# EAGLE board ExtraCore_2-panelized (EAGLE 6.2)
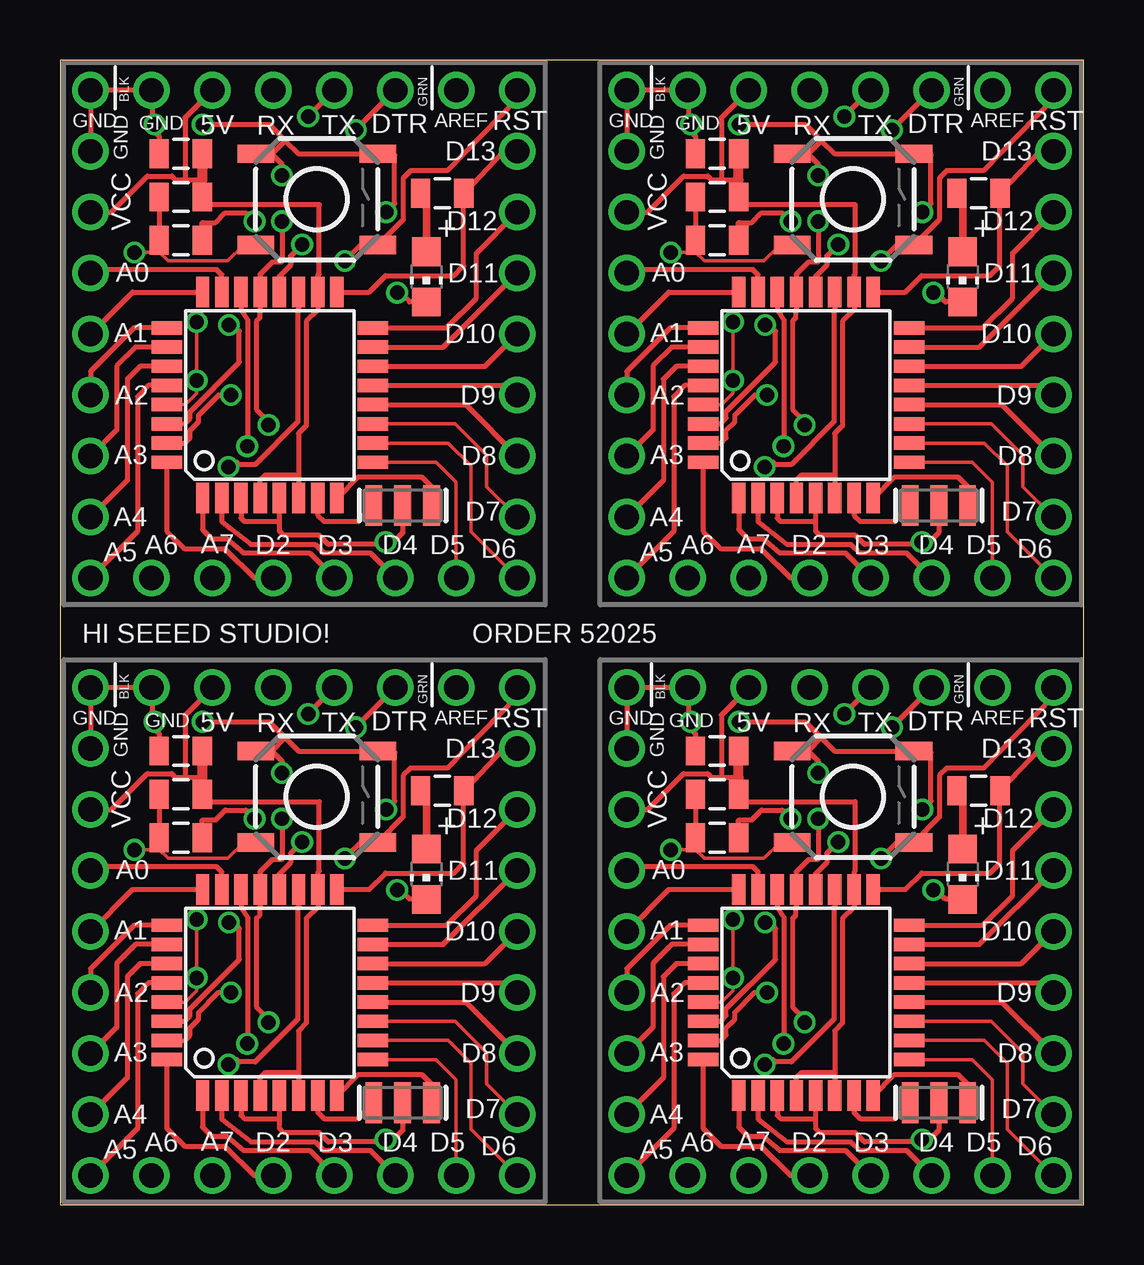
[diagram p0: board, top side]
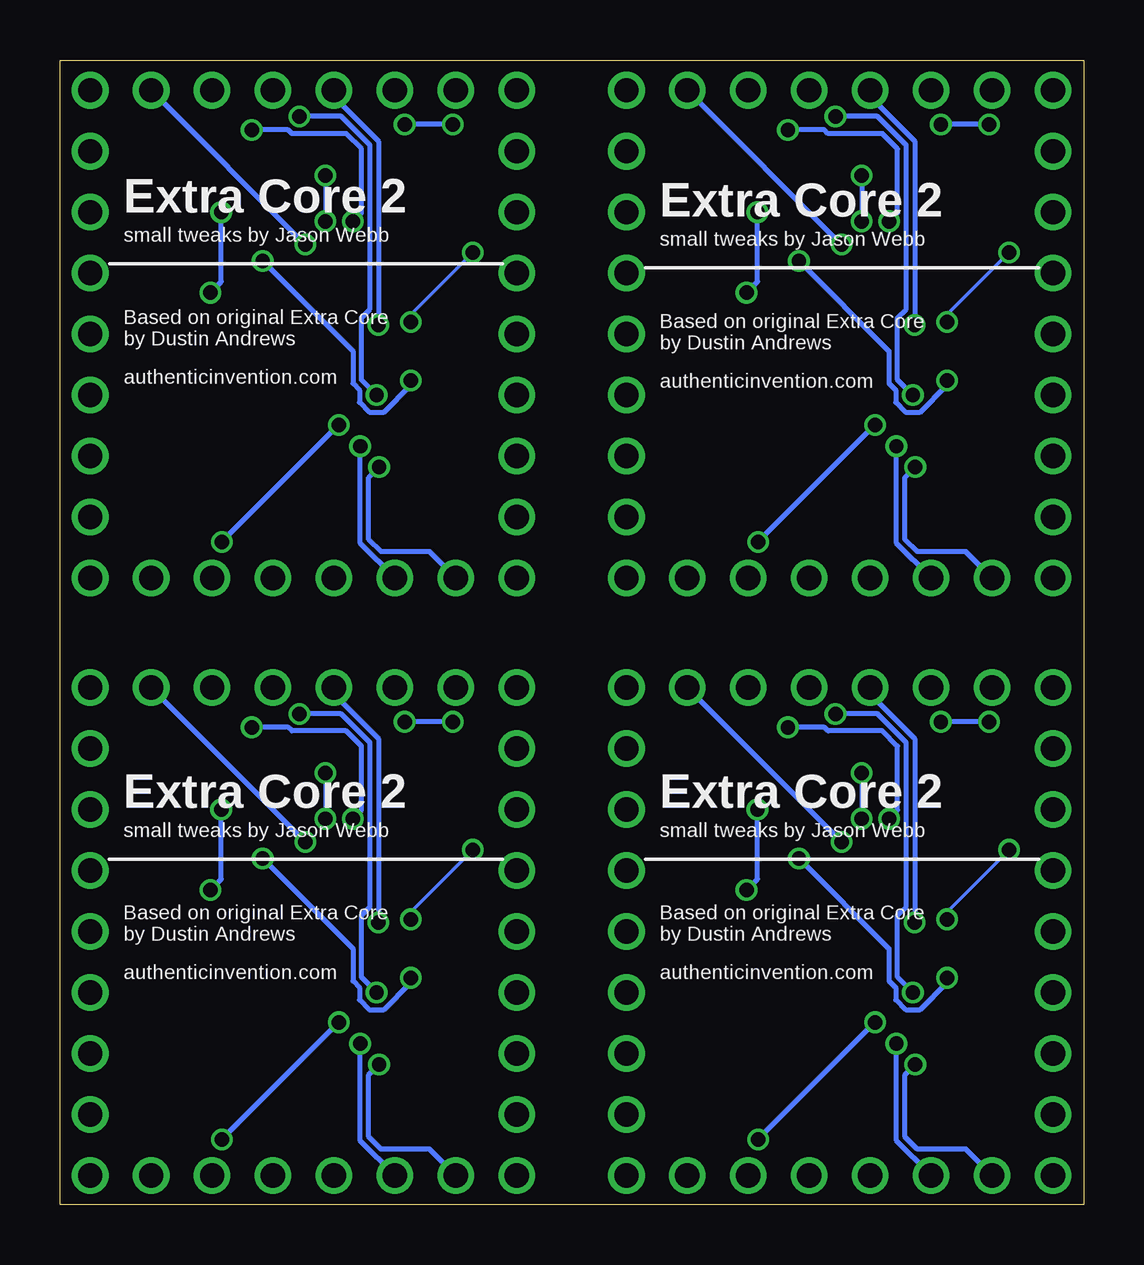
[diagram p1: board, bottom side, seen from below]

Size 42.67 x 47.7 mm. Coordinates in mm from the lower left corner, seen from the top.
Outline: 0,0 42.67,0 42.67,47.7 0,47.7 0,0
Copper layers (1*16): Top 0.035mm / dielectric 1.5mm / Bottom 0.035mm
Design rules: minimum track width 6mil, minimum drill 12mil, track to track 6mil, track to pad 6mil, pad to pad 6mil, via to via 6mil, smd to smd 0mil, copper to edge 10mil, drill to drill 10mil, minimum pad ring 10mil, minimum via ring 6mil, stop-mask expansion 2mil, vias tented up to drill 100mil, thermal gap 10mil

## Footprints (pad centres in the part's own frame; a part is rotated, then mirrored left to right if it is on the bottom)
1X01 = drill 1.016 pad 1.422: 1 0,0
TQFP32-08 = smd 1.27 x 0.559: 1 -4.293,2.8; 2 -4.293,2; 3 -4.293,1.2; 4 -4.293,0.4; 5 -4.293,-0.4; 6 -4.293,-1.2; 7 -4.293,-2; 8 -4.293,-2.8; 17 4.293,-2.8; 18 4.293,-2; 19 4.293,-1.2; 20 4.293,-0.4; 21 4.293,0.4; 22 4.293,1.2; 23 4.293,2; 24 4.293,2.8 | smd 0.559 x 1.27: 9 -2.8,-4.293; 10 -2,-4.293; 11 -1.2,-4.293; 12 -0.4,-4.293; 13 0.4,-4.293; 14 1.2,-4.293; 15 2,-4.293; 16 2.8,-4.293; 25 2.8,4.293; 26 2,4.293; 27 1.2,4.293; 28 0.4,4.293; 29 -0.4,4.293; 30 -1.2,4.293; 31 -2,4.293; 32 -2.8,4.293
0805 = smd 0.8 x 1.2: 1 -0.9,0; 2 0.9,0
1X06 = drill 1.016 pad 1.422: 1 0,0; 2 2.54,0; 3 5.08,0; 4 7.62,0; 5 10.16,0; 6 12.7,0
1X07 = drill 1.016 pad 1.422: 1 0,0; 2 2.54,0; 3 5.08,0; 4 7.62,0; 5 10.16,0; 6 12.7,0; 7 15.24,0
CHIP-LED0805 = smd 1.2 x 1.2: A 0,-1.05; C 0,1.05
TACTILE_SWITCH_SMD = smd 1.524 x 0.762: 1 -2.54,1.905; 2 2.54,1.905; 3 -2.54,-1.905; 4 2.54,-1.905
RESONATOR-SMD = smd 0.7 x 1.7: 1 -1.2,0; 2 0,0; 3 1.2,0

## Placement (x,y rotation side)
A1  M01PTH  [1X01]  1.28,1.23 0 top
A2  M01PTH  [1X01]  23.63,1.23 0 top
A3  M01PTH  [1X01]  1.28,26.12 0 top
A4  M01PTH  [1X01]  23.63,26.12 0 top
AREF1  M01PTH  [1X01]  16.52,21.55 0 top
AREF2  M01PTH  [1X01]  38.87,21.55 0 top
AREF3  M01PTH  [1X01]  16.52,46.44 0 top
AREF4  M01PTH  [1X01]  38.87,46.44 0 top
ATMEGAXX1  ATMEGA168  [TQFP32-08]  8.75,8.85 90 top
ATMEGAXX2  ATMEGA168  [TQFP32-08]  31.1,8.85 90 top
ATMEGAXX3  ATMEGA168  [TQFP32-08]  8.75,33.74 90 top
ATMEGAXX4  ATMEGA168  [TQFP32-08]  31.1,33.74 90 top
C1  0.1uF  [0805]  27.39,15.3 180 top
C2  0.1uF  [0805]  27.39,18.91 0 top
C3  0.1uF  [0805]  5.04,15.3 180 top
C4  0.1uF  [0805]  5.04,18.91 0 top
C5  0.1uF  [0805]  5.04,40.19 180 top
C6  0.1uF  [0805]  5.04,43.8 0 top
C7  0.1uF  [0805]  27.39,40.19 180 top
C8  0.1uF  [0805]  27.39,43.8 0 top
JP1  FTDI Basic  [1X06]  23.63,21.55 0 top
JP2  Analog0  [1X07]  23.63,3.77 90 top
JP3  Digital1  [1X07]  41.41,19.01 270 top
JP4  Analog1 & Digital0  [1X07]  41.41,1.23 180 top
JP5  FTDI Basic  [1X06]  1.28,21.55 0 top
JP6  Analog0  [1X07]  1.28,3.77 90 top
JP7  Digital1  [1X07]  19.06,19.01 270 top
JP8  Analog1 & Digital0  [1X07]  19.06,1.23 180 top
JP9  FTDI Basic  [1X06]  1.28,46.44 0 top
JP10  Analog0  [1X07]  1.28,28.66 90 top
JP11  Digital1  [1X07]  19.06,43.9 270 top
JP12  Analog1 & Digital0  [1X07]  19.06,26.12 180 top
JP13  FTDI Basic  [1X06]  23.63,46.44 0 top
JP14  Analog0  [1X07]  23.63,28.66 90 top
JP15  Digital1  [1X07]  41.41,43.9 270 top
JP16  Analog1 & Digital0  [1X07]  41.41,26.12 180 top
LED1  [CHIP-LED0805]  37.63,13.78 180 top
LED2  [CHIP-LED0805]  15.27,13.78 180 top
LED3  [CHIP-LED0805]  15.27,38.67 180 top
LED4  [CHIP-LED0805]  37.63,38.67 180 top
R1  10K  [0805]  27.39,17.1 0 top
R2  10K  [0805]  38.29,17.25 0 top
R3  10K  [0805]  5.04,17.1 0 top
R4  10K  [0805]  15.93,17.25 0 top
R5  10K  [0805]  5.04,41.99 0 top
R6  10K  [0805]  15.93,42.15 0 top
R7  10K  [0805]  27.39,41.99 0 top
R8  10K  [0805]  38.29,42.15 0 top
RESET1  M01PTH  [1X01]  19.06,21.55 0 top
RESET2  M01PTH  [1X01]  41.41,21.55 0 top
RESET3  M01PTH  [1X01]  19.06,46.44 0 top
RESET4  M01PTH  [1X01]  41.41,46.44 0 top
S1  [TACTILE_SWITCH_SMD]  33.05,17 0 top
S2  [TACTILE_SWITCH_SMD]  10.7,17 0 top
S3  [TACTILE_SWITCH_SMD]  10.7,41.89 0 top
S4  [TACTILE_SWITCH_SMD]  33.05,41.89 0 top
Y1  RESONATORSMD  [RESONATOR-SMD]  36.64,4.25 0 top
Y2  RESONATORSMD  [RESONATOR-SMD]  14.28,4.25 0 top
Y3  RESONATORSMD  [RESONATOR-SMD]  14.28,29.14 0 top
Y4  RESONATORSMD  [RESONATOR-SMD]  36.64,29.14 0 top

## Library data of the parts
A1-A4 AREF1-AREF4 ATMEGAXX1-ATMEGAXX4 C1-C8 JP1-JP16 R1-R8 RESET1-RESET4 S1-S4 Y1-Y4 = SparkFun
LED1-LED4 = adafruit

## Nets
A1: ATMEGAXX2.23 JP2.5
A2: ATMEGAXX2.24 JP2.4
A3: ATMEGAXX2.25 JP2.3
A4: ATMEGAXX2.26 JP2.2
A5: ATMEGAXX2.27 JP2.1
A6: A2.1 ATMEGAXX2.28
A7: ATMEGAXX2.19 JP4.7
A8: ATMEGAXX1.23 JP6.5
A9: ATMEGAXX1.24 JP6.4
A10: ATMEGAXX1.25 JP6.3
A11: ATMEGAXX1.26 JP6.2
A12: ATMEGAXX1.27 JP6.1
A13: A1.1 ATMEGAXX1.28
A14: ATMEGAXX1.19 JP8.7
A15: ATMEGAXX1.22 JP8.6
A16: ATMEGAXX2.22 JP4.6
A17: ATMEGAXX3.23 JP10.5
A18: ATMEGAXX3.24 JP10.4
A19: ATMEGAXX3.25 JP10.3
A20: ATMEGAXX3.26 JP10.2
A21: ATMEGAXX3.27 JP10.1
A22: A3.1 ATMEGAXX3.28
A23: ATMEGAXX3.19 JP12.7
A24: ATMEGAXX3.22 JP12.6
A25: ATMEGAXX4.23 JP14.5
A26: ATMEGAXX4.24 JP14.4
A27: ATMEGAXX4.25 JP14.3
A28: ATMEGAXX4.26 JP14.2
A29: ATMEGAXX4.27 JP14.1
A30: A4.1 ATMEGAXX4.28
A31: ATMEGAXX4.19 JP16.7
A32: ATMEGAXX4.22 JP16.6
AREF1: AREF1.1 ATMEGAXX1.20
AREF2: AREF2.1 ATMEGAXX2.20
AREF3: AREF3.1 ATMEGAXX3.20
AREF4: AREF4.1 ATMEGAXX4.20
D1: ATMEGAXX1.32 JP8.5
D2: ATMEGAXX2.32 JP4.5
D3: ATMEGAXX2.1 JP4.4
D4: ATMEGAXX2.2 JP4.3
D5: ATMEGAXX2.9 JP4.2
D6: ATMEGAXX2.10 JP4.1
D7: ATMEGAXX2.11 JP3.7
D8: ATMEGAXX2.12 JP3.6
D9: ATMEGAXX2.13 JP3.5
D10: ATMEGAXX2.14 JP3.4
D11: ATMEGAXX1.1 JP8.4
D12: ATMEGAXX1.2 JP8.3
D13: ATMEGAXX1.9 JP8.2
D14: ATMEGAXX1.10 JP8.1
D15: ATMEGAXX1.11 JP7.7
D16: ATMEGAXX1.12 JP7.6
D17: ATMEGAXX1.13 JP7.5
D18: ATMEGAXX1.14 JP7.4
D19: ATMEGAXX3.32 JP12.5
D20: ATMEGAXX3.1 JP12.4
D21: ATMEGAXX3.2 JP12.3
D22: ATMEGAXX3.9 JP12.2
D23: ATMEGAXX3.10 JP12.1
D24: ATMEGAXX3.11 JP11.7
D25: ATMEGAXX3.12 JP11.6
D26: ATMEGAXX3.13 JP11.5
D27: ATMEGAXX3.14 JP11.4
D28: ATMEGAXX4.32 JP16.5
D29: ATMEGAXX4.1 JP16.4
D30: ATMEGAXX4.2 JP16.3
D31: ATMEGAXX4.9 JP16.2
D32: ATMEGAXX4.10 JP16.1
D33: ATMEGAXX4.11 JP15.7
D34: ATMEGAXX4.12 JP15.6
D35: ATMEGAXX4.13 JP15.5
D36: ATMEGAXX4.14 JP15.4
DTR1: C3.1 JP5.6
DTR2: C1.1 JP1.6
DTR3: C5.1 JP9.6
DTR4: C7.1 JP13.6
GND1: ATMEGAXX1.3 ATMEGAXX1.5 ATMEGAXX1.21 C4.1 JP5.1 JP5.2 JP6.7 LED2.C S2.1 S2.2 Y2.2
GND2: ATMEGAXX2.3 ATMEGAXX2.5 ATMEGAXX2.21 C2.1 JP1.1 JP1.2 JP2.7 LED1.C S1.1 S1.2 Y1.2
GND3: ATMEGAXX3.3 ATMEGAXX3.5 ATMEGAXX3.21 C6.1 JP9.1 JP9.2 JP10.7 LED3.C S3.1 S3.2 Y3.2
GND4: ATMEGAXX4.3 ATMEGAXX4.5 ATMEGAXX4.21 C8.1 JP13.1 JP13.2 JP14.7 LED4.C S4.1 S4.2 Y4.2
MISO1: ATMEGAXX1.16 JP7.2
MISO2: ATMEGAXX2.16 JP3.2
MISO3: ATMEGAXX3.16 JP11.2
MISO4: ATMEGAXX4.16 JP15.2
MOSI1: ATMEGAXX1.15 JP7.3
MOSI2: ATMEGAXX2.15 JP3.3
MOSI3: ATMEGAXX3.15 JP11.3
MOSI4: ATMEGAXX4.15 JP15.3
N$1: ATMEGAXX1.7 Y2.1
N$2: ATMEGAXX1.8 Y2.3
N$3: ATMEGAXX2.7 Y1.1
N$4: ATMEGAXX2.8 Y1.3
N$5: LED2.A R4.1
N$6: LED1.A R2.1
N$7: ATMEGAXX3.7 Y3.1
N$8: ATMEGAXX3.8 Y3.3
N$9: LED3.A R6.1
N$10: ATMEGAXX4.7 Y4.1
N$11: ATMEGAXX4.8 Y4.3
N$12: LED4.A R8.1
RESET1: ATMEGAXX1.29 C3.2 R3.1 RESET1.1 S2.3 S2.4
RESET2: ATMEGAXX2.29 C1.2 R1.1 RESET2.1 S1.3 S1.4
RESET3: ATMEGAXX3.29 C5.2 R5.1 RESET3.1 S3.3 S3.4
RESET4: ATMEGAXX4.29 C7.2 R7.1 RESET4.1 S4.3 S4.4
RX1: ATMEGAXX1.30 JP5.4
RX2: ATMEGAXX2.30 JP1.4
RX3: ATMEGAXX3.30 JP9.4
RX4: ATMEGAXX4.30 JP13.4
SCK1: ATMEGAXX1.17 JP7.1 R4.2
SCK2: ATMEGAXX2.17 JP3.1 R2.2
SCK3: ATMEGAXX3.17 JP11.1 R6.2
SCK4: ATMEGAXX4.17 JP15.1 R8.2
TX1: ATMEGAXX1.31 JP5.5
TX2: ATMEGAXX2.31 JP1.5
TX3: ATMEGAXX3.31 JP9.5
TX4: ATMEGAXX4.31 JP13.5
VCC1: ATMEGAXX1.4 ATMEGAXX1.6 ATMEGAXX1.18 C4.2 JP5.3 JP6.6 R3.2
VCC2: ATMEGAXX2.4 ATMEGAXX2.6 ATMEGAXX2.18 C2.2 JP1.3 JP2.6 R1.2
VCC3: ATMEGAXX3.4 ATMEGAXX3.6 ATMEGAXX3.18 C6.2 JP9.3 JP10.6 R5.2
VCC4: ATMEGAXX4.4 ATMEGAXX4.6 ATMEGAXX4.18 C8.2 JP13.3 JP14.6 R7.2

## Tracks (layer width: path | path; a pad name or v marks a point on that pad's centre or on a via)
A1
  Top 0.203: ATMEGAXX2.23 29.1,13.87 28.89,14.08 23.81,14.08 JP2.5
A2
  Top 0.203: JP2.4 25.38,13.14 ATMEGAXX2.24
A3
  Top 0.203: ATMEGAXX2.25 25.44,11.65 23.63,9.84 JP2.3
A4
  Top 0.203: ATMEGAXX2.26 25.5,10.85 24.72,10.07 24.72,7.4 JP2.2
A5
  Top 0.203: ATMEGAXX2.27 25.69,10.05 25.16,9.51 25.16,5.29 JP2.1
A6
  Top 0.203: ATMEGAXX2.28 26.04,9.25 25.59,8.8 25.59,3.18 A2.1
A7  (via drill 0.6)
  Top 0.203: v29.37,5.85 29.37,6.05 29.73,6.05 29.83,5.95 30.49,5.95 32.27,7.73 32.27,12.4 32.29,12.43 ATMEGAXX2.19
  Bottom 0.203: v29.37,5.85 29.8,5.42 29.8,2.83 29.3,2.32 27.26,2.32 JP4.7
A8
  Top 0.203: ATMEGAXX1.23 6.75,13.87 6.54,14.08 1.46,14.08 JP6.5
A9
  Top 0.203: JP6.4 3.03,13.14 ATMEGAXX1.24
A10
  Top 0.203: ATMEGAXX1.25 3.09,11.65 1.28,9.84 JP6.3
A11
  Top 0.203: ATMEGAXX1.26 3.15,10.85 2.37,10.07 2.37,7.4 JP6.2
A12
  Top 0.203: ATMEGAXX1.27 3.34,10.05 2.8,9.51 2.8,5.29 JP6.1
A13
  Top 0.203: ATMEGAXX1.28 3.69,9.25 3.23,8.8 3.23,3.18 A1.1
A14  (via drill 0.6)
  Top 0.203: v7.02,5.85 7.02,6.05 7.38,6.05 7.48,5.95 8.14,5.95 9.91,7.73 9.91,12.4 9.94,12.43 ATMEGAXX1.19
  Bottom 0.203: v7.02,5.85 7.45,5.42 7.45,2.83 6.94,2.32 4.91,2.32 JP8.7
A15  (via drill 0.6)
  Top 0.203: v7.81,6.71 7.83,6.66 7.83,11.97 7.55,12.4 ATMEGAXX1.22
  Bottom 0.203: v7.81,6.71 7.81,2.67 JP8.6
A16  (via drill 0.6)
  Top 0.203: v30.16,6.71 30.18,6.66 30.18,11.97 29.9,12.4 ATMEGAXX2.22
  Bottom 0.203: v30.16,6.71 30.16,2.67 JP4.6
A17
  Top 0.203: ATMEGAXX3.23 6.75,38.76 6.54,38.97 1.46,38.97 JP10.5
A18
  Top 0.203: JP10.4 3.03,38.03 ATMEGAXX3.24
A19
  Top 0.203: ATMEGAXX3.25 3.09,36.54 1.28,34.73 JP10.3
A20
  Top 0.203: ATMEGAXX3.26 3.15,35.74 2.37,34.96 2.37,32.29 JP10.2
A21
  Top 0.203: ATMEGAXX3.27 3.34,34.94 2.8,34.4 2.8,30.18 JP10.1
A22
  Top 0.203: ATMEGAXX3.28 3.69,34.14 3.23,33.69 3.23,28.07 A3.1
A23  (via drill 0.6)
  Top 0.203: v7.02,30.74 7.02,30.95 7.38,30.95 7.48,30.84 8.14,30.84 9.91,32.62 9.91,37.3 9.94,37.32 ATMEGAXX3.19
  Bottom 0.203: v7.02,30.74 7.45,30.31 7.45,27.72 6.94,27.21 4.91,27.21 JP12.7
A24  (via drill 0.6)
  Top 0.203: v7.81,31.61 7.83,31.55 7.83,36.86 7.55,37.3 ATMEGAXX3.22
  Bottom 0.203: v7.81,31.61 7.81,27.57 JP12.6
A25
  Top 0.203: ATMEGAXX4.23 29.1,38.76 28.89,38.97 23.81,38.97 JP14.5
A26
  Top 0.203: JP14.4 25.38,38.03 ATMEGAXX4.24
A27
  Top 0.203: ATMEGAXX4.25 25.44,36.54 23.63,34.73 JP14.3
A28
  Top 0.203: ATMEGAXX4.26 25.5,35.74 24.72,34.96 24.72,32.29 JP14.2
A29
  Top 0.203: ATMEGAXX4.27 25.69,34.94 25.16,34.4 25.16,30.18 JP14.1
A30
  Top 0.203: ATMEGAXX4.28 26.04,34.14 25.59,33.69 25.59,28.07 A4.1
A31  (via drill 0.6)
  Top 0.203: v29.37,30.74 29.37,30.95 29.73,30.95 29.83,30.84 30.49,30.84 32.27,32.62 32.27,37.3 32.29,37.32 ATMEGAXX4.19
  Bottom 0.203: v29.37,30.74 29.8,30.31 29.8,27.72 29.3,27.21 27.26,27.21 JP16.7
A32  (via drill 0.6)
  Top 0.203: v30.16,31.61 30.18,31.55 30.18,36.86 29.9,37.3 ATMEGAXX4.22
  Bottom 0.203: v30.16,31.61 30.16,27.57 JP16.6
AREF1  (via drill 0.6)
  Top 0.203: v10.09,15.12 9.61,14.64 9.61,14.26 9.15,13.8 ATMEGAXX1.20
  Bottom 0.203: AREF1.1 v10.09,15.12
AREF2  (via drill 0.6)
  Top 0.203: v32.44,15.12 31.96,14.64 31.96,14.26 31.5,13.8 ATMEGAXX2.20
  Bottom 0.203: AREF2.1 v32.44,15.12
AREF3  (via drill 0.6)
  Top 0.203: v10.09,40.01 9.61,39.53 9.61,39.15 9.15,38.69 ATMEGAXX3.20
  Bottom 0.203: AREF3.1 v10.09,40.01
AREF4  (via drill 0.6)
  Top 0.203: v32.44,40.01 31.96,39.53 31.96,39.15 31.5,38.69 ATMEGAXX4.20
  Bottom 0.203: AREF4.1 v32.44,40.01
D1
  Top 0.203: ATMEGAXX1.32 4.45,3.18 5.19,2.45 6.87,2.45 8.09,1.23 JP8.5
D2
  Top 0.203: ATMEGAXX2.32 26.81,3.18 27.54,2.45 29.22,2.45 30.44,1.23 JP4.5
D3
  Top 0.203: ATMEGAXX2.1 28.3,3.24 28.68,2.85 29.32,2.85 30.01,2.27 32.75,2.27 JP4.4
D4
  Top 0.203: ATMEGAXX2.2 29.1,3.58 29.42,3.31 30.31,2.62 32.98,2.62 33.33,2.27 35.29,2.27 JP4.3
D5
  Top 0.152: ATMEGAXX2.9 38.04,6.05 38.87,5.21 JP4.2
D6
  Top 0.152: ATMEGAXX2.10 38.53,6.85 39.48,5.9 39.48,3.16 JP4.1
D7
  Top 0.152: ATMEGAXX2.11 38.83,7.65 40.14,6.33 40.14,5.04 JP3.7
D8
  Top 0.203: ATMEGAXX2.12 39.27,8.45 JP3.6
D9
  Top 0.203: ATMEGAXX2.13 41.01,9.25 JP3.5
D10
  Top 0.203: ATMEGAXX2.14 40.07,10.05 JP3.4
D11
  Top 0.203: ATMEGAXX1.1 5.95,3.24 6.33,2.85 6.97,2.85 7.65,2.27 10.4,2.27 JP8.4
D12
  Top 0.203: ATMEGAXX1.2 6.75,3.58 7.07,3.31 7.96,2.62 10.63,2.62 10.98,2.27 12.94,2.27 JP8.3
D13
  Top 0.152: ATMEGAXX1.9 15.69,6.05 16.52,5.21 JP8.2
D14
  Top 0.152: ATMEGAXX1.10 16.18,6.85 17.13,5.9 17.13,3.16 JP8.1
D15
  Top 0.152: ATMEGAXX1.11 16.47,7.65 17.79,6.33 17.79,5.04 JP7.7
D16
  Top 0.203: ATMEGAXX1.12 16.92,8.45 JP7.6
D17
  Top 0.203: ATMEGAXX1.13 18.66,9.25 JP7.5
D18
  Top 0.203: ATMEGAXX1.14 17.72,10.05 JP7.4
D19
  Top 0.203: ATMEGAXX3.32 4.45,28.07 5.19,27.34 6.87,27.34 8.09,26.12 JP12.5
D20
  Top 0.203: ATMEGAXX3.1 5.95,28.13 6.33,27.75 6.97,27.75 7.65,27.16 10.4,27.16 JP12.4
D21
  Top 0.203: ATMEGAXX3.2 6.75,28.48 7.07,28.2 7.96,27.52 10.63,27.52 10.98,27.16 12.94,27.16 JP12.3
D22
  Top 0.152: ATMEGAXX3.9 15.69,30.94 16.52,30.11 JP12.2
D23
  Top 0.152: ATMEGAXX3.10 16.18,31.74 17.13,30.79 17.13,28.05 JP12.1
D24
  Top 0.152: ATMEGAXX3.11 16.47,32.54 17.79,31.23 17.79,29.93 JP11.7
D25
  Top 0.203: ATMEGAXX3.12 16.92,33.34 JP11.6
D26
  Top 0.203: ATMEGAXX3.13 18.66,34.14 JP11.5
D27
  Top 0.203: ATMEGAXX3.14 17.72,34.94 JP11.4
D28
  Top 0.203: ATMEGAXX4.32 26.81,28.07 27.54,27.34 29.22,27.34 30.44,26.12 JP16.5
D29
  Top 0.203: ATMEGAXX4.1 28.3,28.13 28.68,27.75 29.32,27.75 30.01,27.16 32.75,27.16 JP16.4
D30
  Top 0.203: ATMEGAXX4.2 29.1,28.48 29.42,28.2 30.31,27.52 32.98,27.52 33.33,27.16 35.29,27.16 JP16.3
D31
  Top 0.152: ATMEGAXX4.9 38.04,30.94 38.87,30.11 JP16.2
D32
  Top 0.152: ATMEGAXX4.10 38.53,31.74 39.48,30.79 39.48,28.05 JP16.1
D33
  Top 0.152: ATMEGAXX4.11 38.83,32.54 40.14,31.23 40.14,29.93 JP15.7
D34
  Top 0.203: ATMEGAXX4.12 39.27,33.34 JP15.6
D35
  Top 0.203: ATMEGAXX4.13 41.01,34.14 JP15.5
D36
  Top 0.203: ATMEGAXX4.14 40.07,34.94 JP15.4
DTR1  (via drill 0.6)
  Top 0.203: v12.33,19.9 JP5.6 | v8.11,16.09 7.76,16.44 6.89,16.44 6.49,16.04 5.95,16.04 5.93,16.01 5.93,15.3 C3.1
  Bottom 0.203: v12.33,19.9 10.8,19.9 10.65,19.74 8.39,19.74 7.76,19.11 7.76,16.44 v8.11,16.09
DTR2  (via drill 0.6)
  Top 0.203: v34.68,19.9 JP1.6 | v30.46,16.09 30.11,16.44 29.24,16.44 28.84,16.04 28.3,16.04 28.28,16.01 C1.1
  Bottom 0.203: v34.68,19.9 33.16,19.9 33,19.74 30.74,19.74 30.11,19.11 30.11,16.44 v30.46,16.09
DTR3  (via drill 0.6)
  Top 0.203: v12.33,44.79 JP9.6 | v8.11,40.98 7.76,41.33 6.89,41.33 6.49,40.93 5.95,40.93 5.93,40.9 5.93,40.19 C5.1
  Bottom 0.203: v12.33,44.79 10.8,44.79 10.65,44.64 8.39,44.64 7.76,44 7.76,41.33 v8.11,40.98
DTR4  (via drill 0.6)
  Top 0.203: v34.68,44.79 JP13.6 | v30.46,40.98 30.11,41.33 29.24,41.33 28.84,40.93 28.3,40.93 28.28,40.9 C7.1
  Bottom 0.203: v34.68,44.79 33.16,44.79 33,44.64 30.74,44.64 30.11,44 30.11,41.33 v30.46,40.98
GND1  (via drill 0.6)
  Top 0.203: Y2.2 14.28,3.11 13.8,2.62 13.57,2.62 | 13.57,2.62 11.19,2.62 10.8,3.01 9.33,3.01 9.15,3.18 9.15,3.59 | 9.15,3.59 ATMEGAXX1.5 | ATMEGAXX1.3 7.55,3.72 7.68,3.59 9.15,3.59 | JP6.7 JP5.1 JP5.2 3.87,21.47 3.87,20.12 | v8.7,7.6 8.7,7.75 8.19,8.26 8.19,11.92 8.31,12.05 8.31,12.4 8.34,12.43 ATMEGAXX1.21 8.34,13.22 8.34,13.88 8.85,14.38 9.23,14.38 9.25,14.41 v9.25,16.09 | v13.57,2.73 13.57,2.62 | 3.87,20.12 3.87,19.9 4.15,19.62 C4.1 | 9.39,19.45 8.72,20.12 v5.95,20.12 | 9.39,19.45 9.94,18.91 S2.2 13.9,18.91 13.95,18.86 13.95,16.82 v13.6,16.47 | v3.95,20.12 3.87,20.12 | 9.39,19.45 8.85,18.91 S2.1 8.9,18.83 9.25,18.47 v9.25,17.99 | v14.05,13.12 14.18,13.12 14.56,12.73 LED2.C
  Bottom 0.203: v13.57,2.73 v8.7,7.6 | v3.95,20.12 v5.95,20.12 | v9.25,17.99 v9.25,16.09 | v13.6,16.47 13.6,13.57 v14.05,13.12
GND2  (via drill 0.6)
  Top 0.203: Y1.2 36.63,3.11 36.15,2.62 35.92,2.62 | 35.92,2.62 33.54,2.62 33.16,3.01 31.68,3.01 31.5,3.18 31.5,3.59 | 31.5,3.59 ATMEGAXX2.5 | ATMEGAXX2.3 29.9,3.72 30.03,3.59 31.5,3.59 | JP2.7 JP1.1 JP1.2 26.22,21.47 26.22,20.12 | v31.05,7.6 31.05,7.75 30.54,8.26 30.54,11.92 30.67,12.05 30.67,12.4 30.69,12.43 ATMEGAXX2.21 30.69,13.22 30.69,13.88 31.2,14.38 31.58,14.38 31.61,14.41 v31.61,16.09 | v35.92,2.73 35.92,2.62 | 26.22,20.12 26.22,19.9 26.5,19.62 26.5,18.91 C2.1 | 31.75,19.45 31.07,20.12 v28.3,20.12 | 31.75,19.45 32.29,18.91 S1.2 36.25,18.91 36.3,18.86 36.3,16.82 v35.95,16.47 | v26.3,20.12 26.22,20.12 | 31.75,19.45 31.2,18.91 S1.1 31.25,18.83 31.61,18.47 v31.61,17.99 | v36.41,13.12 36.53,13.12 36.91,12.73 LED1.C
  Bottom 0.203: v35.92,2.73 v31.05,7.6 | v26.3,20.12 v28.3,20.12 | v31.61,17.99 v31.61,16.09 | v35.95,16.47 35.95,13.57 v36.41,13.12
GND3  (via drill 0.6)
  Top 0.203: Y3.2 14.28,28 13.8,27.52 13.57,27.52 | 13.57,27.52 11.19,27.52 10.8,27.9 9.33,27.9 9.15,28.07 9.15,28.48 | 9.15,28.48 ATMEGAXX3.5 | ATMEGAXX3.3 7.55,28.61 7.68,28.48 9.15,28.48 | JP10.7 JP9.1 JP9.2 3.87,46.36 3.87,45.02 | v8.7,32.49 8.7,32.65 8.19,33.16 8.19,36.81 8.31,36.94 8.31,37.3 8.34,37.32 ATMEGAXX3.21 8.34,38.11 8.34,38.77 8.85,39.28 9.23,39.28 9.25,39.3 v9.25,40.98 | v13.57,27.62 13.57,27.52 | 3.87,45.02 3.87,44.79 4.15,44.51 C6.1 | 9.39,44.34 8.72,45.02 v5.95,45.02 | 9.39,44.34 9.94,43.8 S3.2 13.9,43.8 13.95,43.75 13.95,41.72 v13.6,41.36 | v3.95,45.02 3.87,45.02 | 9.39,44.34 8.85,43.8 S3.1 8.9,43.72 9.25,43.37 v9.25,42.88 | v14.05,38.01 14.18,38.01 14.56,37.63 LED3.C
  Bottom 0.203: v13.57,27.62 v8.7,32.49 | v3.95,45.02 v5.95,45.02 | v9.25,42.88 v9.25,40.98 | v13.6,41.36 13.6,38.46 v14.05,38.01
GND4  (via drill 0.6)
  Top 0.203: Y4.2 36.63,28 36.15,27.52 35.92,27.52 | 35.92,27.52 33.54,27.52 33.16,27.9 31.68,27.9 31.5,28.07 31.5,28.48 | 31.5,28.48 ATMEGAXX4.5 | ATMEGAXX4.3 29.9,28.61 30.03,28.48 31.5,28.48 | JP14.7 JP13.1 JP13.2 26.22,46.36 26.22,45.02 | v31.05,32.49 31.05,32.65 30.54,33.16 30.54,36.81 30.67,36.94 30.67,37.3 30.69,37.32 ATMEGAXX4.21 30.69,38.11 30.69,38.77 31.2,39.28 31.58,39.28 31.61,39.3 v31.61,40.98 | v35.92,27.62 35.92,27.52 | 26.22,45.02 26.22,44.79 26.5,44.51 26.5,43.8 C8.1 | 31.75,44.34 31.07,45.02 v28.3,45.02 | 31.75,44.34 32.29,43.8 S4.2 36.25,43.8 36.3,43.75 36.3,41.72 v35.95,41.36 | v26.3,45.02 26.22,45.02 | 31.75,44.34 31.2,43.8 S4.1 31.25,43.72 31.61,43.37 v31.61,42.88 | v36.41,38.01 36.53,38.01 36.91,37.63 LED4.C
  Bottom 0.203: v35.92,27.62 v31.05,32.49 | v26.3,45.02 v28.3,45.02 | v31.61,42.88 v31.61,40.98 | v35.95,41.36 35.95,38.46 v36.41,38.01
MISO1
  Top 0.203: ATMEGAXX1.16 16.12,11.65 17.36,12.89 17.36,14.77 JP7.2
MISO2
  Top 0.203: ATMEGAXX2.16 38.47,11.65 39.71,12.89 39.71,14.77 JP3.2
MISO3
  Top 0.203: ATMEGAXX3.16 16.12,36.54 17.36,37.78 17.36,39.66 JP11.2
MISO4
  Top 0.203: ATMEGAXX4.16 38.47,36.54 39.71,37.78 39.71,39.66 JP15.2
MOSI1
  Top 0.203: ATMEGAXX1.15 15.98,10.85 JP7.3
MOSI2
  Top 0.203: ATMEGAXX2.15 38.33,10.85 JP3.3
MOSI3
  Top 0.203: ATMEGAXX3.15 15.98,35.74 JP11.3
MOSI4
  Top 0.203: ATMEGAXX4.15 38.33,35.74 JP15.3
N$1
  Top 0.203: ATMEGAXX1.7 10.75,3.85 11.01,3.59 12.42,3.59 Y2.1
N$2
  Top 0.203: Y2.3 15.48,5.03 15.1,5.42 12.41,5.42 ATMEGAXX1.8
N$3
  Top 0.203: ATMEGAXX2.7 33.1,3.85 33.36,3.59 34.77,3.59 Y1.1
N$4
  Top 0.203: Y1.3 37.84,5.03 37.45,5.42 34.76,5.42 ATMEGAXX2.8
N$5
  Top 0.305: R4.1 15.27,17.25 LED2.A
N$6
  Top 0.305: R2.1 37.63,17.25 LED1.A
N$7
  Top 0.203: ATMEGAXX3.7 10.75,28.74 11.01,28.48 12.42,28.48 Y3.1
N$8
  Top 0.203: Y3.3 15.48,29.92 15.1,30.31 12.41,30.31 ATMEGAXX3.8
N$9
  Top 0.305: R6.1 15.27,42.15 LED3.A
N$10
  Top 0.203: ATMEGAXX4.7 33.1,28.74 33.36,28.48 34.77,28.48 Y4.1
N$11
  Top 0.203: Y4.3 37.84,29.92 37.45,30.31 34.76,30.31 ATMEGAXX4.8
N$12
  Top 0.305: R8.1 37.63,42.15 LED4.A
RESET1  (via drill 0.6)
  Top 0.152: v5.7,11.9 v5.7,9.46 5.7,8.92 5.22,8.44 ATMEGAXX1.29 | v3.11,14.79 4.1,14.79 4.12,14.82 | 4.12,14.82 4.12,15.25 C3.2 | S2.3 7.63,15.07 6.99,14.44 4.5,14.44 4.12,14.82
  Top 0.203: R3.1 C3.2 | RESET1.1 19.06,21.19 16.14,18.2 14.61,18.2 14.31,17.89 14.31,16.16 S2.4 12.53,15.1 v11.87,14.44
  Bottom 0.152: v5.7,11.9 5.7,12.2 v3.11,14.79
  Bottom 0.203: v5.7,9.46 5.7,9.25 6.82,8.14 7.42,8.14 7.83,8.54 7.83,9.05 8.11,9.33 8.11,10.68 v11.87,14.44
RESET2  (via drill 0.6)
  Top 0.152: v28.05,11.9 v28.05,9.46 28.05,8.92 27.57,8.44 ATMEGAXX2.29 | v25.46,14.79 26.45,14.79 26.48,14.82 | 26.48,14.82 26.48,15.25 C1.2 | S1.3 29.98,15.07 29.35,14.44 26.86,14.44 26.48,14.82
  Top 0.203: R1.1 C1.2 | RESET2.1 41.41,21.19 38.49,18.2 36.97,18.2 36.66,17.89 36.66,16.16 S1.4 34.88,15.1 v34.22,14.44
  Bottom 0.152: v28.05,11.9 28.05,12.2 v25.46,14.79
  Bottom 0.203: v28.05,9.46 28.05,9.25 29.17,8.14 29.78,8.14 30.18,8.54 30.18,9.05 30.46,9.33 30.46,10.68 v34.22,14.44
RESET3  (via drill 0.6)
  Top 0.152: v5.7,36.79 v5.7,34.35 5.7,33.82 5.22,33.33 ATMEGAXX3.29 | v3.11,39.68 4.1,39.68 4.12,39.71 | 4.12,39.71 4.12,40.14 C5.2 | S3.3 7.63,39.96 6.99,39.33 4.5,39.33 4.12,39.71
  Top 0.203: R5.1 C5.2 | RESET3.1 19.06,46.08 16.14,43.09 14.61,43.09 14.31,42.78 14.31,41.05 S3.4 12.53,39.99 v11.87,39.33
  Bottom 0.152: v5.7,36.79 5.7,37.09 v3.11,39.68
  Bottom 0.203: v5.7,34.35 5.7,34.15 6.82,33.03 7.42,33.03 7.83,33.44 7.83,33.94 8.11,34.22 8.11,35.57 v11.87,39.33
RESET4  (via drill 0.6)
  Top 0.152: v28.05,36.79 v28.05,34.35 28.05,33.82 27.57,33.33 ATMEGAXX4.29 | v25.46,39.68 26.45,39.68 26.48,39.71 | 26.48,39.71 26.48,40.14 C7.2 | S4.3 29.98,39.96 29.35,39.33 26.86,39.33 26.48,39.71
  Top 0.203: R7.1 C7.2 | RESET4.1 41.41,46.08 38.49,43.09 36.97,43.09 36.66,42.78 36.66,41.05 S4.4 34.88,39.99 v34.22,39.33
  Bottom 0.152: v28.05,36.79 28.05,37.09 v25.46,39.68
  Bottom 0.203: v28.05,34.35 28.05,34.15 29.17,33.03 29.78,33.03 30.18,33.44 30.18,33.94 30.46,34.22 30.46,35.57 v34.22,39.33
RX1  (via drill 0.6)
  Top 0.203: ATMEGAXX1.30 5.19,7.65 5.42,7.88 5.42,8.16 7.48,10.22 7.48,11.52 7.22,11.77 v7.04,11.77
  Bottom 0.203: v7.04,11.77 7.04,19.41 8.9,21.27 JP5.4
RX2  (via drill 0.6)
  Top 0.203: ATMEGAXX2.30 27.54,7.65 27.77,7.88 27.77,8.16 29.83,10.22 29.83,11.52 29.57,11.77 v29.4,11.77
  Bottom 0.203: v29.4,11.77 29.4,19.41 31.25,21.27 JP1.4
RX3  (via drill 0.6)
  Top 0.203: ATMEGAXX3.30 5.19,32.55 5.42,32.77 5.42,33.05 7.48,35.11 7.48,36.41 7.22,36.66 v7.04,36.66
  Bottom 0.203: v7.04,36.66 7.04,44.31 8.9,46.16 JP9.4
RX4  (via drill 0.6)
  Top 0.203: ATMEGAXX4.30 27.54,32.55 27.77,32.77 27.77,33.05 29.83,35.11 29.83,36.41 29.57,36.66 v29.4,36.66
  Bottom 0.203: v29.4,36.66 29.4,44.31 31.25,46.16 JP13.4
SCK1
  Top 0.203: JP7.1 18.49,19.01 R4.2 16.82,14.23 16.42,13.83 13.57,13.83 12.89,13.14 ATMEGAXX1.17
SCK2
  Top 0.203: JP3.1 40.84,19.01 R2.2 39.17,17.24 39.17,14.23 38.77,13.83 35.92,13.83 35.24,13.14 ATMEGAXX2.17
SCK3
  Top 0.203: JP11.1 18.49,43.9 R6.2 16.82,42.14 16.82,39.12 16.42,38.72 13.57,38.72 12.89,38.03 ATMEGAXX3.17
SCK4
  Top 0.203: JP15.1 40.84,43.9 R8.2 39.17,42.14 39.17,39.12 38.77,38.72 35.92,38.72 35.24,38.03 ATMEGAXX4.17
TX1  (via drill 0.6)
  Top 0.203: v10.35,20.45 JP5.5 | v7.12,8.85 6.61,8.85 5.77,8.01 5.77,7.73 5.42,7.37 5.42,7.07 5.19,6.84 ATMEGAXX1.31
  Bottom 0.203: v10.35,20.45 8.59,20.45 7.4,19.26 7.4,12.43 7.76,12.07 7.76,9.48 v7.12,8.85
TX2  (via drill 0.6)
  Top 0.203: v32.7,20.45 JP1.5 | v29.47,8.85 28.96,8.85 28.13,8.01 28.13,7.73 27.77,7.37 27.77,7.07 27.54,6.84 ATMEGAXX2.31
  Bottom 0.203: v32.7,20.45 30.95,20.45 29.75,19.26 29.75,12.43 30.11,12.07 30.11,9.48 v29.47,8.85
TX3  (via drill 0.6)
  Top 0.203: v10.35,45.35 JP9.5 | v7.12,33.74 6.61,33.74 5.77,32.9 5.77,32.62 5.42,32.27 5.42,31.96 5.19,31.73 ATMEGAXX3.31
  Bottom 0.203: v10.35,45.35 8.59,45.35 7.4,44.15 7.4,37.32 7.76,36.97 7.76,34.38 v7.12,33.74
TX4  (via drill 0.6)
  Top 0.203: v32.7,45.35 JP13.5 | v29.47,33.74 28.96,33.74 28.13,32.9 28.13,32.62 27.77,32.27 27.77,31.96 27.54,31.73 ATMEGAXX4.31
  Bottom 0.203: v32.7,45.35 30.95,45.35 29.75,44.15 29.75,37.32 30.11,36.97 30.11,34.38 v29.47,33.74
VCC1
  Top 0.203: 9.94,5.52 9.94,7.25 10.27,7.58 10.27,11.92 10.75,12.4 ATMEGAXX1.18 10.75,13.22 10.75,13.85 10.8,13.9 10.8,16.8 5.93,16.8 5.93,17 R3.2 5.93,17.2 5.93,17.76 5.88,17.81 5.22,17.81 | 9.94,5.52 ATMEGAXX1.6 | 9.94,5.52 8.57,5.52 8.34,5.29 ATMEGAXX1.4 | 5.22,17.81 4.81,17.81 4.66,17.97 3.64,17.97 2.14,16.47 JP6.6 | 5.22,17.81 5.22,20.41 JP5.3
  Top 0.406: 5.88,17.81 5.94,17.81 C4.2
VCC2
  Top 0.203: 32.29,5.52 32.29,7.25 32.62,7.58 32.62,11.92 33.1,12.4 ATMEGAXX2.18 33.1,13.22 33.1,13.85 33.16,13.9 33.16,16.8 28.28,16.8 28.28,17 R1.2 28.28,17.2 28.28,17.76 28.23,17.81 27.57,17.81 | 32.29,5.52 ATMEGAXX2.6 | 32.29,5.52 30.92,5.52 30.69,5.29 ATMEGAXX2.4 | 27.57,17.81 27.16,17.81 27.01,17.97 25.99,17.97 24.49,16.47 JP2.6 | 27.57,17.81 27.57,20.41 JP1.3
  Top 0.406: 28.23,17.81 28.29,17.81 C2.2
VCC3
  Top 0.203: 9.94,30.41 9.94,32.14 10.27,32.47 10.27,36.81 10.75,37.3 ATMEGAXX3.18 10.75,38.11 10.75,38.74 10.8,38.79 10.8,41.69 5.93,41.69 5.93,41.89 R5.2 5.93,42.1 5.93,42.66 5.88,42.71 5.22,42.71 | 9.94,30.41 ATMEGAXX3.6 | 9.94,30.41 8.57,30.41 8.34,30.18 ATMEGAXX3.4 | 5.22,42.71 4.81,42.71 4.66,42.86 3.64,42.86 2.14,41.36 JP10.6 | 5.22,42.71 5.22,45.3 JP9.3
  Top 0.406: 5.88,42.71 5.94,42.71 C6.2
VCC4
  Top 0.203: 32.29,30.41 32.29,32.14 32.62,32.47 32.62,36.81 33.1,37.3 ATMEGAXX4.18 33.1,38.11 33.1,38.74 33.16,38.79 33.16,41.69 28.28,41.69 28.28,41.89 R7.2 28.28,42.1 28.28,42.66 28.23,42.71 27.57,42.71 | 32.29,30.41 ATMEGAXX4.6 | 32.29,30.41 30.92,30.41 30.69,30.18 ATMEGAXX4.4 | 27.57,42.71 27.16,42.71 27.01,42.86 25.99,42.86 24.49,41.36 JP14.6 | 27.57,42.71 27.57,45.3 JP13.3
  Top 0.406: 28.23,42.71 28.29,42.71 C8.2

## Text on the board
tPlace: GRN | GRN | BLK | AREF | BLK | AREF | GND | GND | 5V | RX | TX | DTR | RST | GND | GND | 5V | RX | TX | DTR | RST | GND | D13 | GND | D13 | VCC | D12 | VCC | D12 | A0 | D11 | A0 | D11 | A1 | D10 | A1 | D10 | A2 | A2 | D9 | D9 | A3 | D8 | A3 | D8 | D7 | D7 | A4 | A5 | A6 | D2 | A4 | A5 | A6 | D2 | A7 | D3 | D4 | D5 | D6 | A7 | D3 | D4 | D5 | D6 | HI SEEED STUDIO! | ORDER 52025 | GRN | GRN | BLK | AREF | BLK | AREF | GND | GND | 5V | RX | TX | DTR | RST | GND | GND | 5V | RX | TX | DTR | RST | GND | D13 | GND | D13 | VCC | D12 | VCC | D12 | A0 | D11 | A0 | D11 | A1 | D10 | A1 | D10 | A2 | A2 | D9 | D9 | A3 | D8 | A3 | D8 | D7 | D7 | A4 | A5 | A6 | D2 | A4 | A5 | A6 | D2 | A7 | D3 | D4 | D5 | D6 | A7 | D3 | D4 | D5 | D6
bPlace: Extra Core 2 | Extra Core 2 | small tweaks by Jason Webb | small tweaks by Jason Webb | Based on original Extra Core | Based on original Extra Core | by Dustin Andrews | by Dustin Andrews | authenticinvention.com | authenticinvention.com | Extra Core 2 | Extra Core 2 | small tweaks by Jason Webb | small tweaks by Jason Webb | Based on original Extra Core | Based on original Extra Core | by Dustin Andrews | by Dustin Andrews | authenticinvention.com | authenticinvention.com
_tNames: C1 | C1 | R2 | R2 | R1 | S1 | R1 | S1 | C2 | C2 | ATMEGA328 | ATMEGA328 | Y1 | Y1 | C1 | C1 | R1 | S1 | R2 | R1 | S1 | R2 | C2 | C2 | ATMEGA328 | ATMEGA328 | Y1 | Y1